# Altium PCB toon_analytic_bodies.PcbDoc
Units mil, origin at the board's own origin, x right, y up, seen from the top; angles counter-clockwise.
Board outline 7000 x 5000 mil, 2 copper layers (Top Layer, Bottom Layer), stack 61.7 mil thick; 14 components, 0 nets, 0 pads, 0 vias.
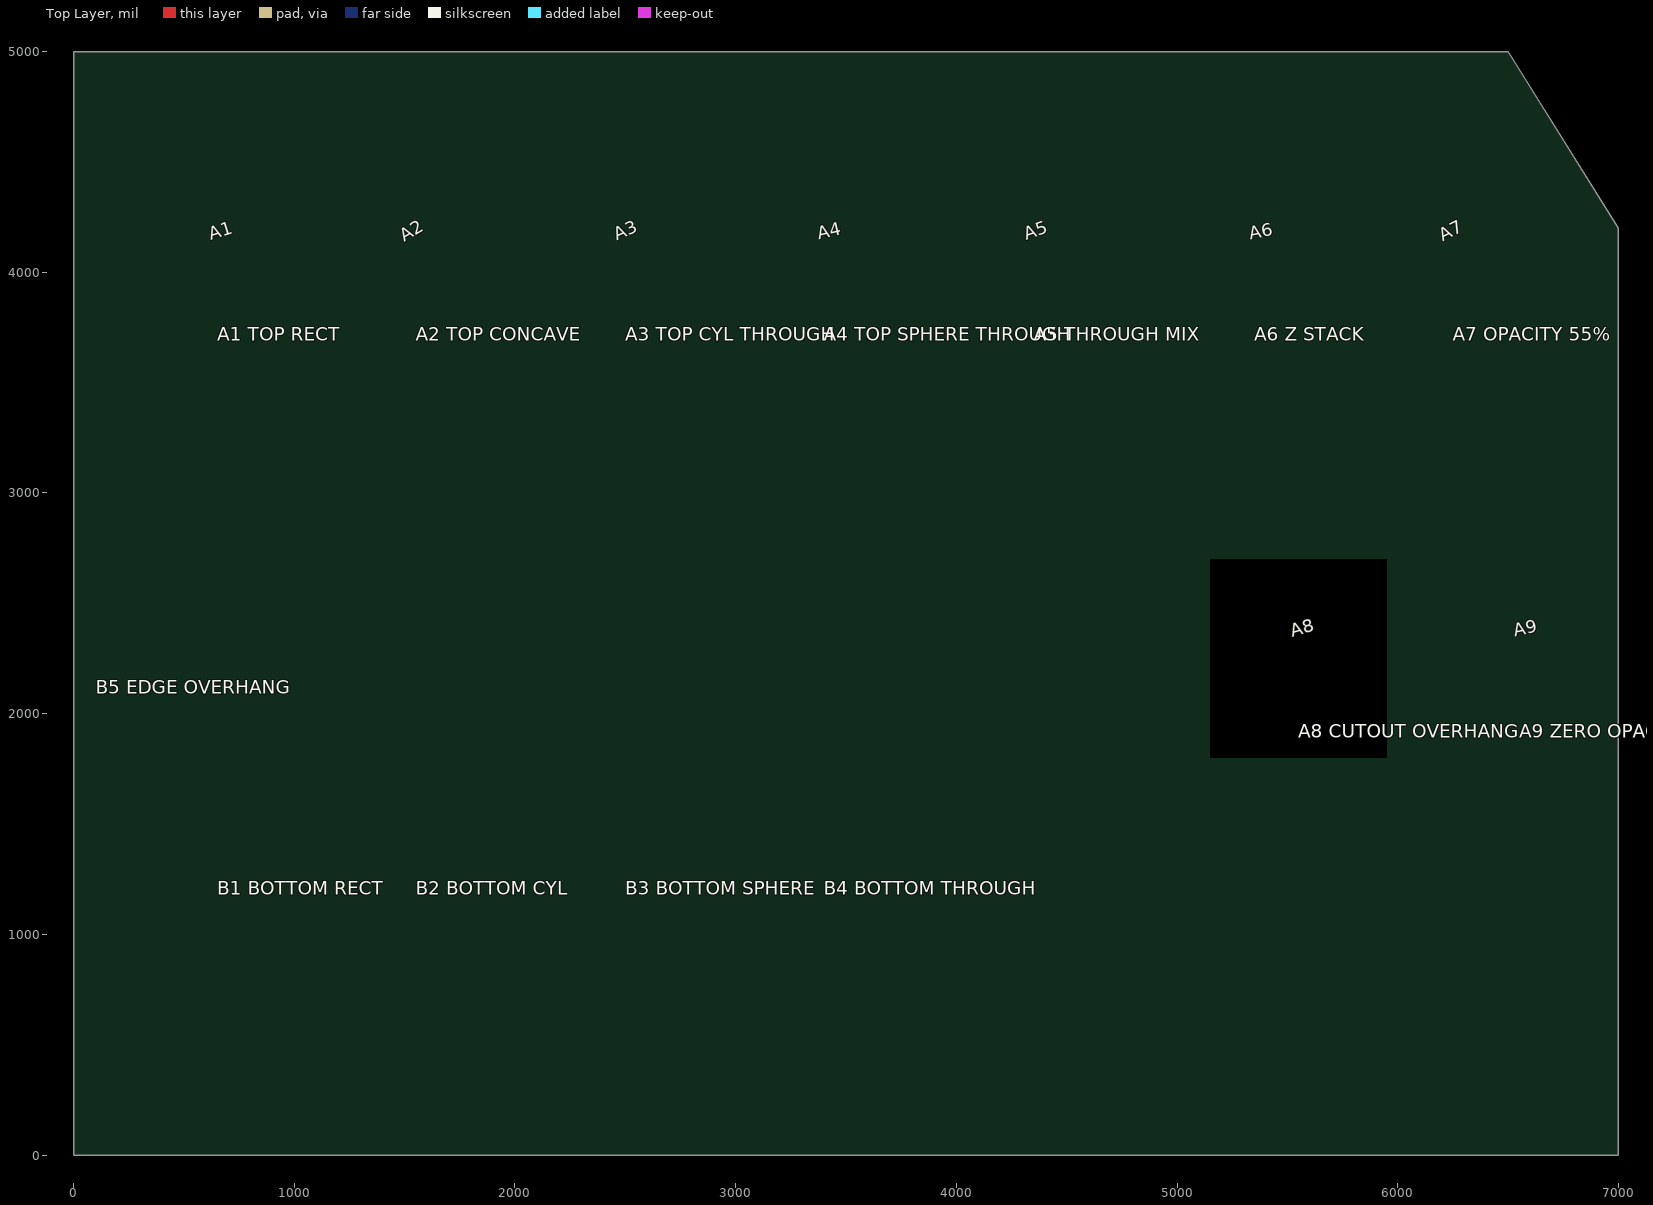
[diagram p0: Top Layer view]
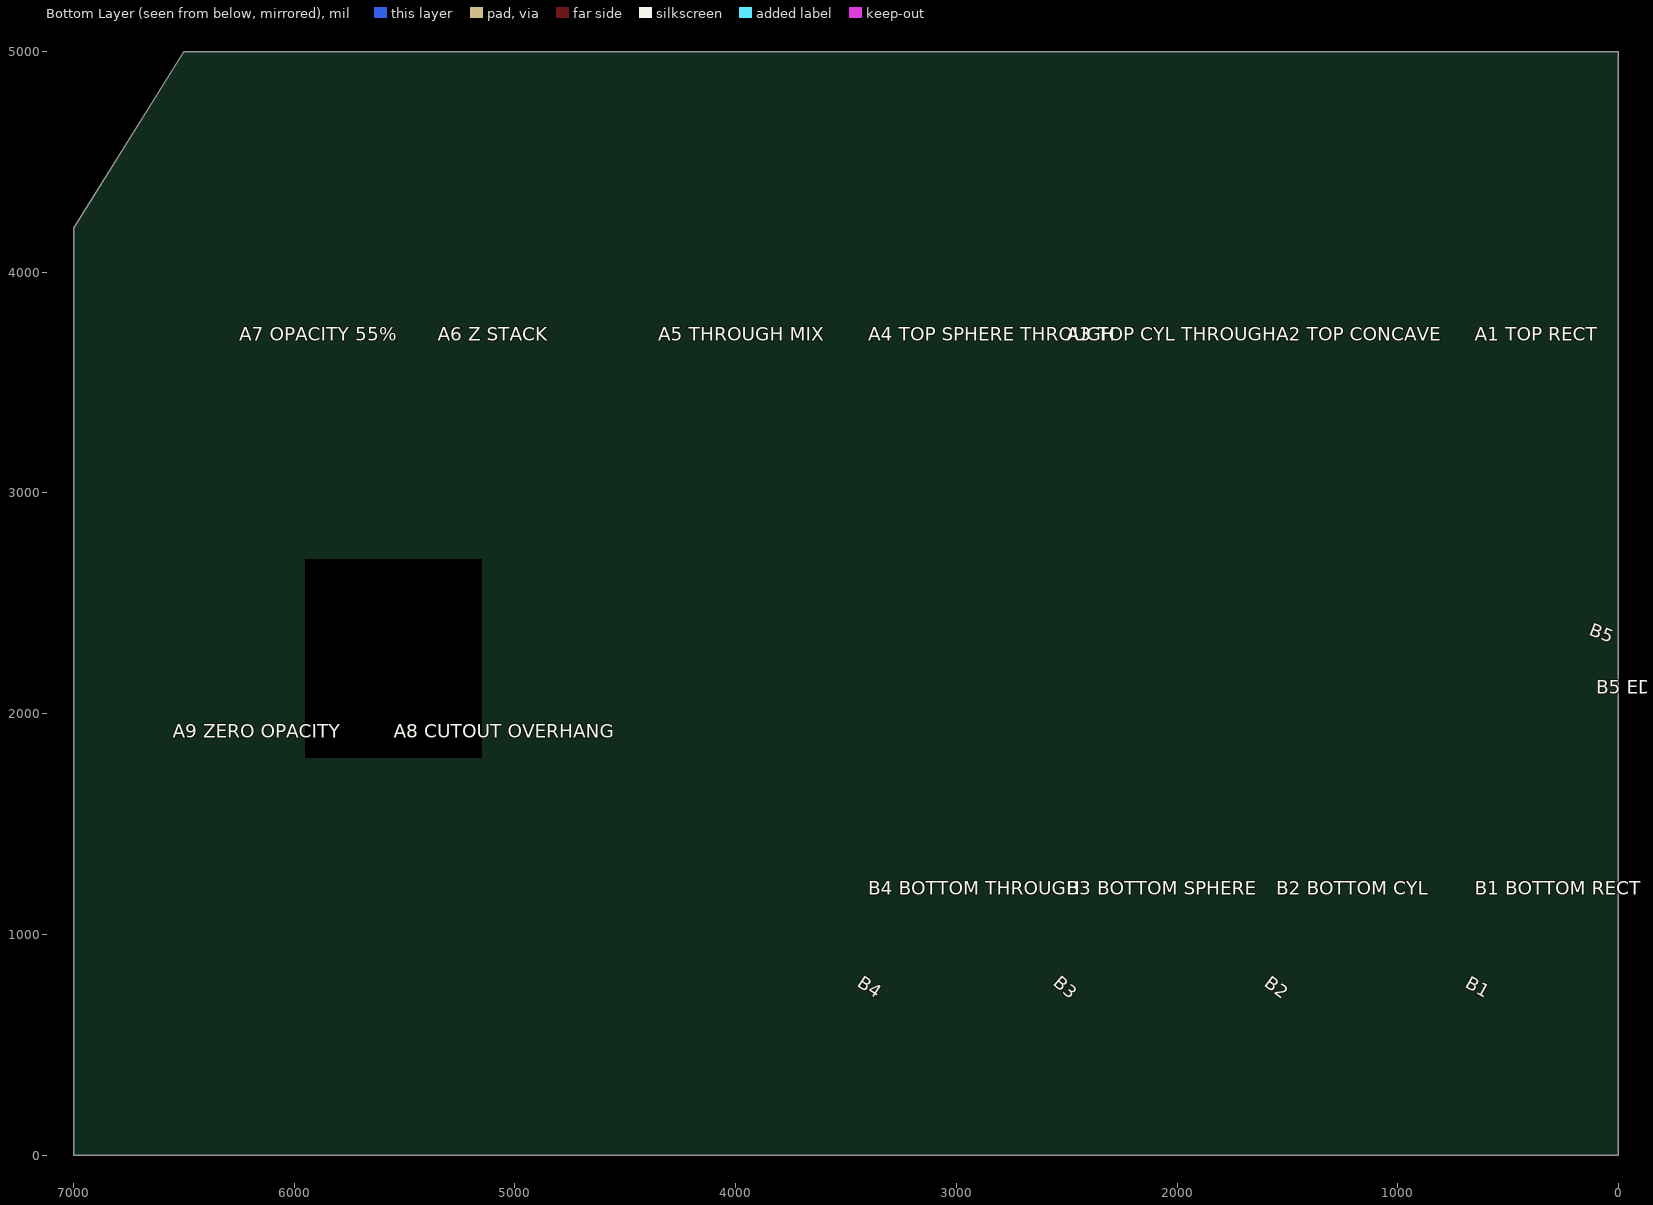
[diagram p1: Bottom Layer view, seen from below]

## Layer stack, top to bottom
Top Solder: solder mask 0.4, Solder Resist, Dk 3.5
Top Layer: signal copper 1.4
Dielectric 1: dielectric 58.9, FR-4, Dk 4.8
Bottom Layer: signal copper 1.4
Bottom Solder: solder mask 0.4, Solder Resist, Dk 3.5

## Board outline
0,0 7000,0 7000,4200 6500,5000 0,5000
cut-out: 5150,1800 5950,1800 5950,2700 5150,2700

## Design rules (kind name [scope] priority, off if disabled: settings)
Clearance [All] p1: gap=10 ignorepadtopadclearanceinfootprint=FALSE except(0: Arc-Hole Track-Hole SMDPad-Hole THPad-Hole Via-Hole Fill-Hole Poly-Hole Region-Hole Text-Hole)
PolygonConnect [All] p1: connectstyle=Relief reliefconductorwidth=10 reliefentries=4 polygonreliefangle="90 Angle" airgapwidth=10
RoutingVias [All] p1: holewidth=28 width=50 viastyle="Through Hole" minholewidth=28 minwidth=50 maxholewidth=28 maxwidth=50
SolderMaskExpansion [All] p1: expansion=4 istentingtop=FALSE
Width [All] p1: maxlimit=10 minlimit=10 preferedwidth=10
30 further rules are at their usual default settings.

## Components (designator, comment, footprint, x,y, rotation, side; value= is the part's Value field where it differs from the comment)
A1 "TOP RECT" TOON_A1_TOP_RECT 650,4050 r17 top
A2 "TOP CONCAVE" TOON_A2_TOP_CONCAVE 1550,4050 r31 top
A3 "TOP CYL THROUGH" TOON_A3_TOP_CYL_THROUGH 2500,4050 r23 top
A4 "TOP SPHERE THROUGH" TOON_A4_TOP_SPHERE_THROUGH 3400,4050 r13 top
A5 "THROUGH MIX" TOON_A5_THROUGH_MIX 4350,4050 r19 top
A6 "Z STACK" TOON_A6_Z_STACK 5350,4050 r11 top
A7 "OPACITY 55%" TOON_A7_OPACITY_55% 6250,4050 r27 top
A8 "CUTOUT OVERHANG" TOON_A8_CUTOUT_OVERHANG 5550,2250 r16 top
A9 "ZERO OPACITY" TOON_A9_ZERO_OPACITY 6550,2250 r12 top
B1 "BOTTOM RECT" TOON_B1_BOTTOM_RECT 650,850 r29 bottom
B2 "BOTTOM CYL" TOON_B2_BOTTOM_CYL 1550,850 r37 bottom
B3 "BOTTOM SPHERE" TOON_B3_BOTTOM_SPHERE 2500,850 r41 bottom
B4 "BOTTOM THROUGH" TOON_B4_BOTTOM_THROUGH 3400,850 r33 bottom
B5 "EDGE OVERHANG" TOON_B5_EDGE_OVERHANG 100,2450 r21 bottom

## Footprints (in the part's own frame and the unit in brackets; to place one, negate y for a bottom-side part, rotate by r counter-clockwise, add the part's x,y. Pads: shape width x height; smd on the part's side, far side on the other; paste and mask are expansions set on the pad)
TOON_A1_TOP_RECT [mil]
  body extent -210,-150 210,150, height 150
TOON_A2_TOP_CONCAVE [mil]
  body extent -180,-205 320,135, height 170
TOON_A3_TOP_CYL_THROUGH [mil]
  body extent -85,-235 275,125, height 220
TOON_A4_TOP_SPHERE_THROUGH [mil]
  body extent -250,-130 110,230, height 210
TOON_A5_THROUGH_MIX [mil]
  body extent -350,-180 200,180, height 220
TOON_A6_Z_STACK [mil]
  body extent -150,-110 150,110, height 175
TOON_A7_OPACITY_55% [mil]
  body extent -210,-150 210,150, height 160
TOON_A8_CUTOUT_OVERHANG [mil]
  body extent -520,-330 520,330, height 150
TOON_A9_ZERO_OPACITY [mil]
  body extent -210,-150 210,150, height 150
TOON_B1_BOTTOM_RECT [mil]
  body extent -210,-150 210,150, height 150
TOON_B2_BOTTOM_CYL [mil]
  body extent -100,-225 260,135, height 180
TOON_B3_BOTTOM_SPHERE [mil]
  body extent -250,-135 110,225, height 322
TOON_B4_BOTTOM_THROUGH [mil]
  body extent -210,-150 210,150, height 120
TOON_B5_EDGE_OVERHANG [mil]
  body extent -380,-190 380,190, height 150

## Part data
A1: "surface-contained convex extrusion with nonzero component rotation"
A2: "offset concave extrusion with nonzero component rotation"
A3: "isolated offset cylinder crossing the complete board slab"
A4: "offset sphere crossing the complete board slab"
A5: "staged compound: through extrusion, top-only cylinder, and lower/side sphere"
A6: "same-XY extrusion intervals include a gap, exact touch, and overlap"
A7: "uniform partial opacity applied once to the final component instance"
A8: "top-authored body spanning the routed interior cutout"
A9: "zero-opacity body must be omitted before geometry and occlusion"
B1: "bottom-authored counterpart of the surface extrusion"
B2: "bottom-authored offset surface cylinder"
B3: "bottom-authored offset surface sphere"
B4: "bottom-authored extrusion crossing the complete board slab"
B5: "bottom-authored body extending beyond the left board edge"

## Nets (pads, with @x,y where several pads share a name; then routed paths per layer and width w, separated by ;. In a path a pad name is that pad's centre, name@x,y a point inside that pad or via, vN(x,y) a via of type N, cw(c..) or ccw(c..) an arc to the next point about the centre after c; other vN are vias at no path point)

## Silkscreen, mask and mechanical layers (free items; w line width, h text height)
Top Overlay:
  text "A1 TOP RECT" at 650,3690 h62
  text "A2 TOP CONCAVE" at 1550,3690 h62
  text "A3 TOP CYL THROUGH" at 2500,3690 h62
  text "A4 TOP SPHERE THROUGH" at 3400,3690 h62
  text "A5 THROUGH MIX" at 4350,3690 h62
  text "A6 Z STACK" at 5350,3690 h62
  text "A7 OPACITY 55%" at 6250,3690 h62
  text "B5 EDGE OVERHANG" at 100,2090 h62
  text "A8 CUTOUT OVERHANG" at 5550,1890 h62
  text "A9 ZERO OPACITY" at 6550,1890 h62
  text "B1 BOTTOM RECT" at 650,1180 h62
  text "B2 BOTTOM CYL" at 1550,1180 h62
  text "B3 BOTTOM SPHERE" at 2500,1180 h62
  text "B4 BOTTOM THROUGH" at 3400,1180 h62
Bottom Overlay:
  text "A1 TOP RECT" at 650,3690 h62
  text "A2 TOP CONCAVE" at 1550,3690 h62
  text "A3 TOP CYL THROUGH" at 2500,3690 h62
  text "A4 TOP SPHERE THROUGH" at 3400,3690 h62
  text "A5 THROUGH MIX" at 4350,3690 h62
  text "A6 Z STACK" at 5350,3690 h62
  text "A7 OPACITY 55%" at 6250,3690 h62
  text "B5 EDGE OVERHANG" at 100,2090 h62
  text "A8 CUTOUT OVERHANG" at 5550,1890 h62
  text "A9 ZERO OPACITY" at 6550,1890 h62
  text "B1 BOTTOM RECT" at 650,1180 h62
  text "B2 BOTTOM CYL" at 1550,1180 h62
  text "B3 BOTTOM SPHERE" at 2500,1180 h62
  text "B4 BOTTOM THROUGH" at 3400,1180 h62